# Altium PCB GMAX0505_MB.PcbDoc
Units mm, origin at the board's own origin, x right, y up, seen from the top; angles counter-clockwise.
Board outline 185 x 150 mm, 2 copper layers (Top Layer, Bottom Layer); 54 components, 80 nets, 242 pads, 0 vias.
Unrouted connection lines stored in the file: 141.
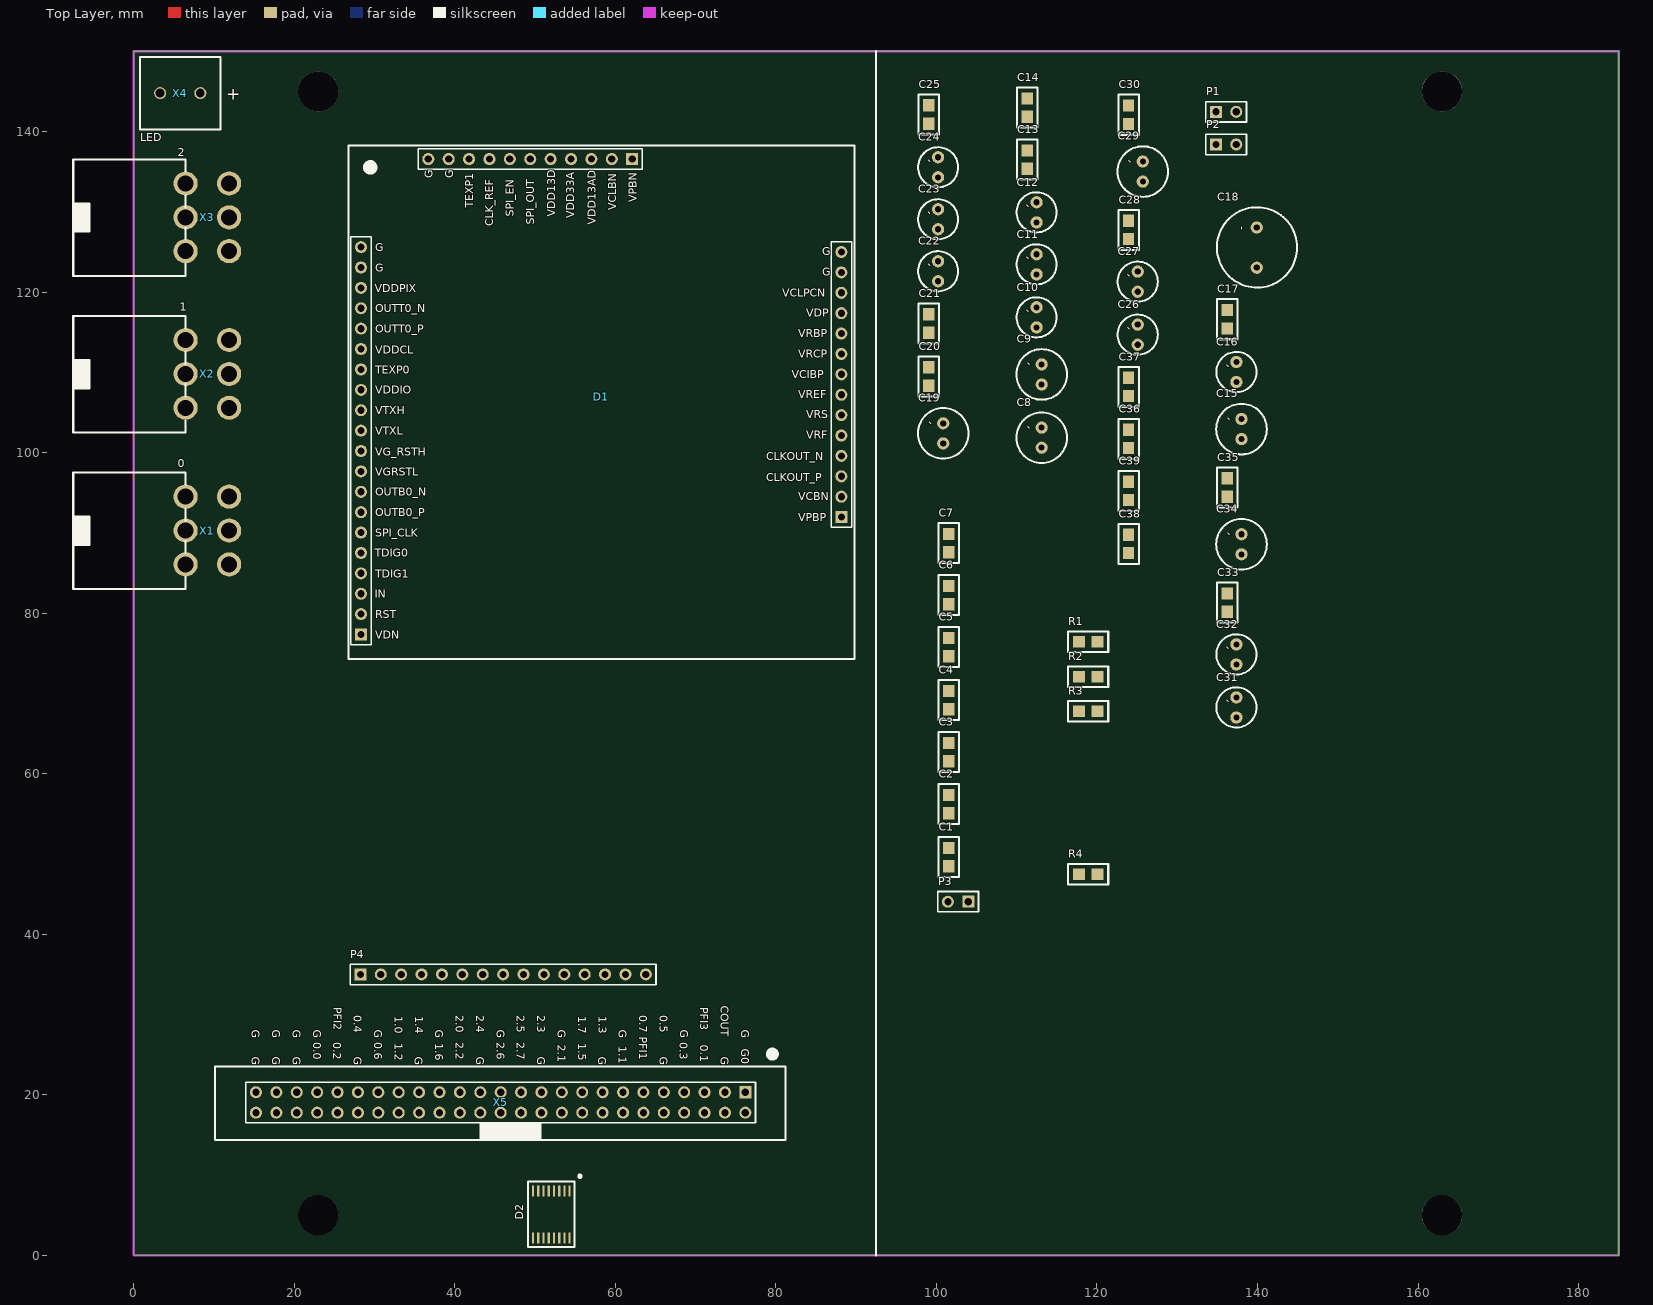
[diagram p0: Top Layer view]
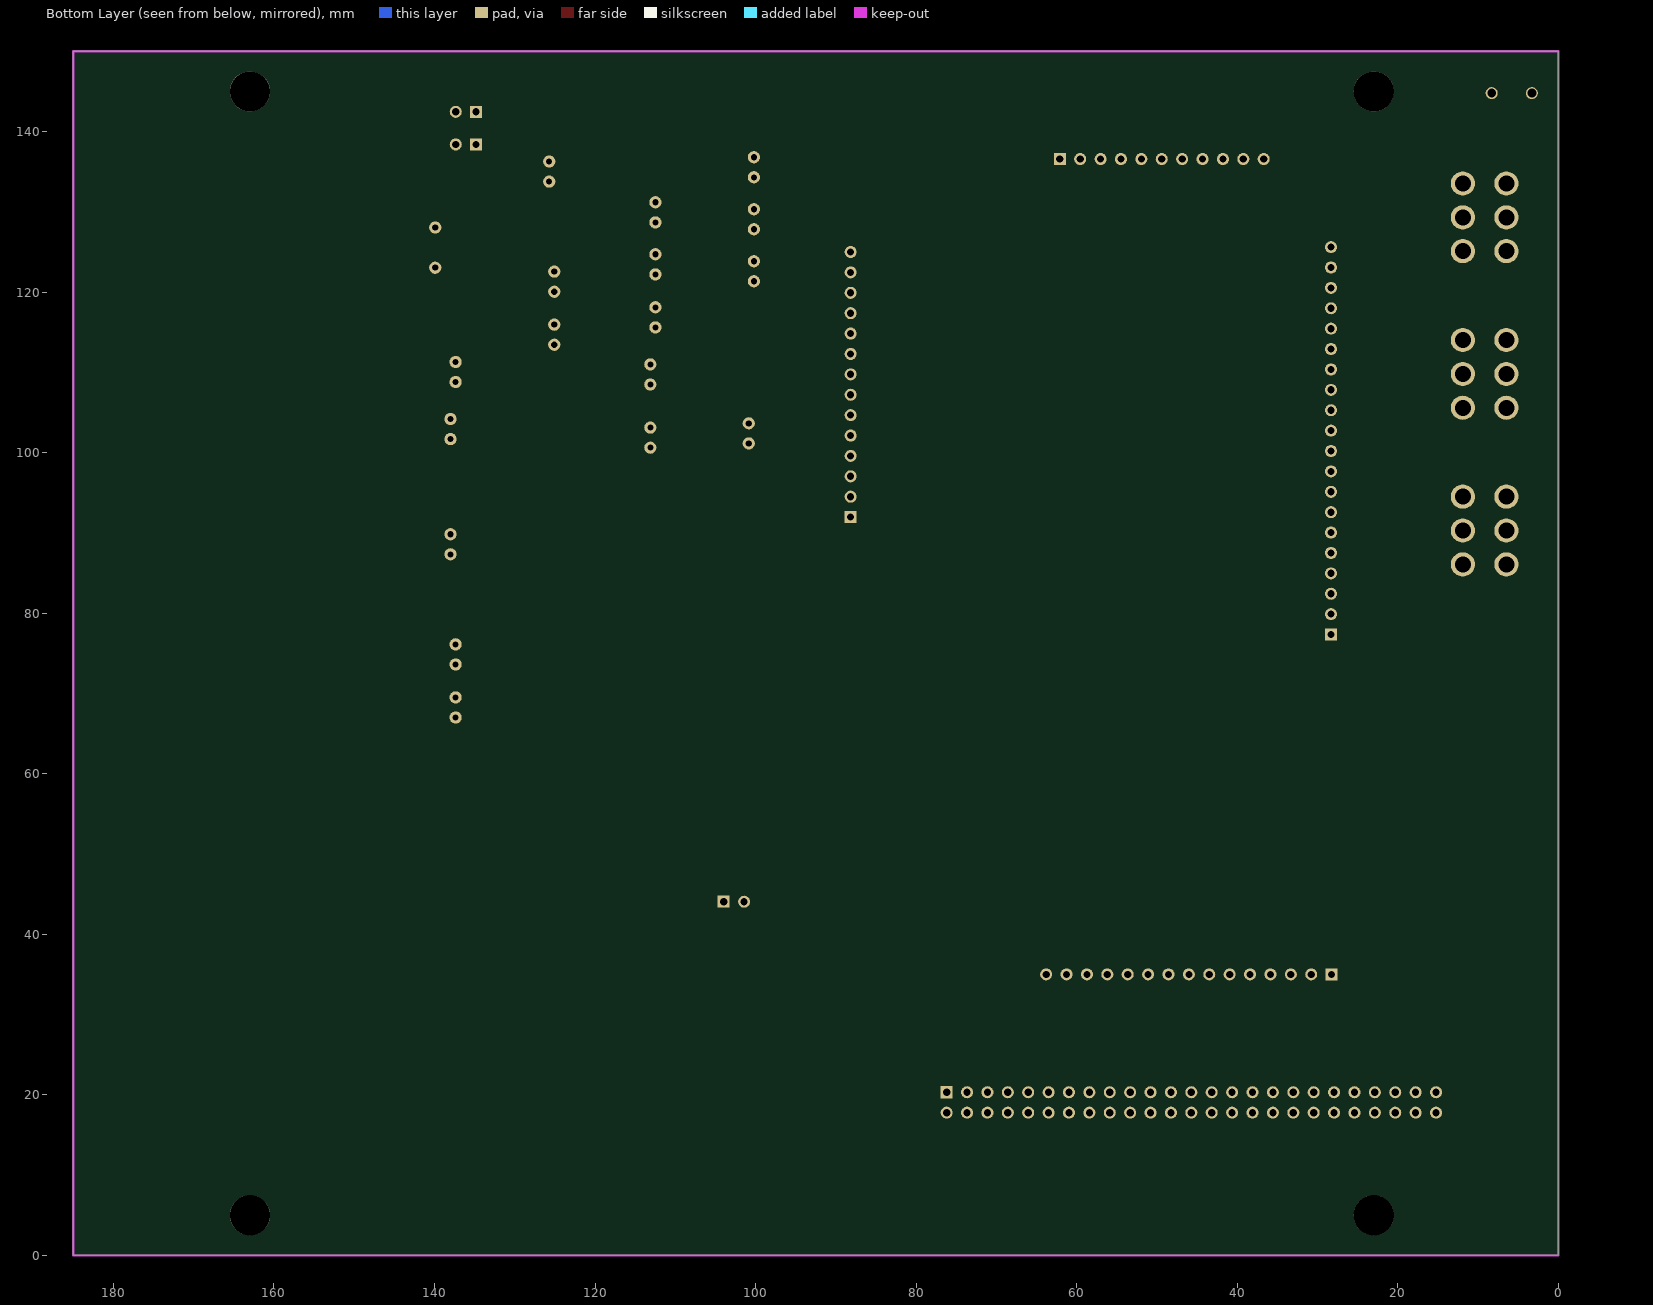
[diagram p1: Bottom Layer view, seen from below]

## Layer stack, top to bottom
Top Solder: solder mask 0.0102, Solder Resist, Dk 3.5
Top Layer: signal copper 0.0356
Dielectric 1: dielectric 0.32, FR-4, Dk 4.8
Bottom Layer: signal copper 0.0356
Bottom Solder: solder mask 0.0102, Solder Resist, Dk 3.5

## Board outline
0,0 0,150 185,150 185,0

## Design rules (kind name [scope] priority, off if disabled: settings)
BoardOutlineClearance [OnLayer('Multi-Layer')] p1: gap=0.254 ignorepadtopadclearanceinfootprint=FALSE except(0: Arc-SplitContinuation Track-SplitContinuation SMDPad-SplitContinuation THPad-SplitContinuation Via-SplitContinuation Fill-SplitContinuation Poly-SplitContinuation Region-SplitContinuation Text-SplitContinuation; 0.4: Arc-OutlineEdge Track-OutlineEdge SMDPad-OutlineEdge THPad-OutlineEdge Via-OutlineEdge Fill-OutlineEdge Poly-OutlineEdge Region-OutlineEdge Text-OutlineEdge)
Clearance [All] p1: gap=0.125 ignorepadtopadclearanceinfootprint=FALSE except(0.2: Arc-Fill Arc-Poly Track-Fill Track-Poly SMDPad-Fill SMDPad-Poly THPad-Fill THPad-Poly Via-Fill Via-Poly Fill-Fill Fill-Poly Poly-Poly Poly-Region Poly-Text; 0.25: Arc-Hole Track-Hole SMDPad-Hole THPad-Hole Via-Hole Fill-Hole Poly-Hole Region-Hole Text-Hole) // Standart
DiffPairsRouting [All] p1: maxlimit=0.254 minlimit=0.127 mostfreqgap=0.13 toplayer_minwidth=0.127 toplayer_maxwidth=0.381 toplayer_prefwidth=0.37 bottomlayer_minwidth=0.127 bottomlayer_maxwidth=0.381 bottomlayer_prefwidth=0.37 maxuncoupledlength=12.7
HoleSize [All] p1: absolutevalues=TRUE maxlimit=5 minlimit=0.3 maxpercent=80.000 minpercent=20.000
MinimumSolderMaskSliver [All] p1: minsoldermaskwidth=0.1
PlaneClearance "PlaneClearance-1 1/2 Oz" [All] p1: clearance=0.2 // Standart
PlaneConnect "TermalConnect-1 1/2 Oz" [All] p1: planeconnectstyle=Relief reliefexpansion=0.2 reliefentries=4 reliefconductorwidth=0.2 reliefairgap=0.2 // Standart
PolygonConnect "PolygonConnect-1 1/2 Oz" [All] p1: thpad.connectstyle=Relief thpad.reliefconductorwidth=0.15 thpad.reliefentries=4 thpad.polygonreliefangle="90 Angle" thpad.airgapwidth=0.2 smdpad.connectstyle=Relief smdpad.reliefconductorwidth=0.2 smdpad.reliefentries=4 smdpad.polygonreliefangle="90 Angle" smdpad.airgapwidth=0.2 via.connectstyle=Direct via.reliefconductorwidth=0.254 via.reliefentries=4 via.polygonreliefangle="90 Angle" via.airgapwidth=0.254 // Standart
RoutingVias [All] p1: holewidth=0.3 width=1.27 viastyle="Through Hole" minholewidth=0.3 minwidth=0.6 maxholewidth=0.711 maxwidth=1.27
SilkToSilkClearance [All] p1: silktosilkclearance=0
SilkToSolderMaskClearance [IsPad] p1: minsilkscreentomaskgap=0 clearancetoexposedcopper=TRUE
SolderMaskExpansion [All] p1: expansion=0.102 istentingtop=FALSE
UnRoutedNet [All] p1: checkbadconnections=TRUE
Width [All] p1: maxlimit=2.5 minlimit=0.125 preferedwidth=0.37
22 further rules are at their usual default settings.

## Classes and differential pairs
differential pair OUTT0: +OUTT0_P -OUTT0_N
differential pair OUTB0: +OUTB0_P -OUTB0_N
differential pair CLKOUT: +CLKOUT_P -CLKOUT_N
differential pair 4: +4_P -4_N
differential pair 3: +3_P -3_N
differential pair 2: +2_P -2_N
differential pair 1: +1_P -1_N

## Components (designator, comment, footprint, x,y, rotation, side; value= is the part's Value field where it differs from the comment)
C1 "0,1 мкФ" CAP_SMALL 102.828,47.105 r90 top
C2 "0,1 мкФ" CAP_SMALL 102.828,53.709 r90 top
C3 "0,1 мкФ" CAP_SMALL 102.828,60.186 r90 top
C4 "0,1 мкФ" CAP_SMALL 102.828,66.663 r90 top
C5 "0,1 мкФ" CAP_SMALL 102.828,73.267 r90 top
C6 "0,1 мкФ" CAP_SMALL 102.828,79.744 r90 top
C7 "0,1 мкФ" CAP_SMALL 102.828,86.221 r90 top
C8 "100 мкФ" Cap_0612_electrolitic 113.115,101.867 r90 top
C9 "100 мкФ" Cap_0612_electrolitic 113.115,109.741 r90 top
C10 "22 мкФ" Cap_0511_electrolitic 112.48,116.853 r90 top
C11 "22 мкФ" Cap_0511_electrolitic 112.48,123.457 r90 top
C12 "22 мкФ" Cap_0511_electrolitic 112.48,129.934 r90 top
C13 "0,1 мкФ" CAP_SMALL 112.607,133.998 r90 top
C14 "0,1 мкФ" CAP_SMALL 112.607,140.475 r90 top
C15 "100 мкФ" Cap_0612_electrolitic 138.007,102.934 r90 top
C16 "10 мкФ" Cap_0511_electrolitic 137.372,110.046 r90 top
C17 "0,1 мкФ" CAP_SMALL 137.499,114.11 r90 top
C18 "330 мкФ" Cap_1013_electrolitic 139.912,125.54 r90 top
C19 "100 мкФ" Cap_0612_electrolitic 100.847,102.4 r90 top
C20 "0,1 мкФ" CAP_SMALL 100.339,106.972 r90 top
C21 "0,1 мкФ" CAP_SMALL 100.339,113.576 r90 top
C22 "22 мкФ" Cap_0511_electrolitic 100.212,122.593 r90 top
C23 "22 мкФ" Cap_0511_electrolitic 100.212,129.07 r90 top
C24 "22 мкФ" Cap_0511_electrolitic 100.212,135.547 r90 top
C25 "0,1 мкФ" CAP_SMALL 100.339,139.611 r90 top
C26 "22 мкФ" Cap_0511_electrolitic 125.078,114.694 r90 top
C27 "22 мкФ" Cap_0511_electrolitic 125.078,121.298 r90 top
C28 "0,1 мкФ" CAP_SMALL 125.205,125.235 r90 top
C29 "100 мкФ" Cap_0612_electrolitic 125.713,135.014 r90 top
C30 "0,1 мкФ" CAP_SMALL 125.205,139.586 r90 top
C31 "22 мкФ" Cap_0511_electrolitic 137.372,68.263 r90 top
C32 "22 мкФ" Cap_0511_electrolitic 137.372,74.867 r90 top
C33 "0,1 мкФ" CAP_SMALL 137.499,78.804 r90 top
C34 "100 мкФ" Cap_0612_electrolitic 138.007,88.583 r90 top
C35 "0,1 мкФ" CAP_SMALL 137.499,93.155 r90 top
C36 "0,1 мкФ" CAP_SMALL 125.205,99.2 r90 top
C37 "0,1 мкФ" CAP_SMALL 125.205,105.677 r90 top
C38 "0,1 мкФ" CAP_SMALL 125.205,86.119 r90 top
C39 "0,1 мкФ" CAP_SMALL 125.205,92.723 r90 top
D1 "GMAX0505" GMAX0505_MEZ 28.321,77.343 r0 top
D2 "SN65LVDS048A" "SN65LVDS048A (4LVDS)" 54.31,8.034 r180 top
P1 "GND" HDR1X2 134.815,142.456 r0 top
P2 "GND" HDR1X2 134.815,138.392 r0 top
P3 "GND" HDR1X2 103.971,44.057 r180 top
P4 "Header 15" HDR1X15 28.245,35.001 r0 top
R1 "100" RES 121.395,75.172 r90 top
R2 "100" RES 121.395,70.854 r90 top
R3 "100" RES 121.395,66.536 r90 top
R4 "100" RES 121.395,46.216 r90 top
X1 "0" POWER 6.477,94.514 r90 top
X2 "1" POWER 6.477,114.022 r90 top
X3 "2" POWER 6.477,133.53 r90 top
X4 "LED" KLEMMNIK_2 3.302,144.78 r0 top
X5 "IDC_7953" IDC_7953 76.2,20.32 r180 top

## Footprints (in the part's own frame and the unit in brackets; to place one, negate y for a bottom-side part, rotate by r counter-clockwise, add the part's x,y. Pads: shape width x height; smd on the part's side, far side on the other; paste and mask are expansions set on the pad)
Cap_0511_electrolitic [mil]
  round 60 hole 30: 1(-49.21,0) 2(49.21,0)
  silkscreen extent -98,-98 98,98
Cap_0612_electrolitic [mil]
  round 60 hole 30: 1(-49.21,0) 2(49.21,0)
  silkscreen extent -124,-124 124,124
Cap_1013_electrolitic [mil]
  round 60 hole 30: 1(-98.43,0) 2(98.43,0)
  silkscreen extent -196,-198 198,196
CAP_SMALL [mil] "FROM_MAX"
  rect 60x55.98 smd: 1(53.71,50) 2(143.71,50)
  silkscreen extent 1,0 197,100, body extent 20,18 178,82, height 100
GMAX0505_MEZ [mm] "GMAX0505_MEZ"
  rect 1.5x1.5 hole 0.9: 1(0,0) 31(33.782,59.233) 45(59.842,14.63)
  round 1.5 hole 0.9: 2(0,2.54) 3(0,5.08) 4(0,7.62) 5(0,10.16) 6(0,12.7) 7(0,15.24) 8(0,17.78) 9(0,20.32) 10(0,22.86) 11(0,25.4) 12(0,27.94) 13(0,30.48) 14(0,33.02) 15(0,35.56) 16(0,38.1) 17(0,40.64) 18(0,43.18) 19(0,45.72) 20(0,48.26) 21(8.382,59.233) 22(10.922,59.233) 23(13.462,59.233) 24(16.002,59.233) 25(18.542,59.233) 26(21.082,59.233) 27(23.622,59.233) 28(26.162,59.233) 29(28.702,59.233) 30(31.242,59.233) 32(59.842,47.65) 33(59.842,45.11) 34(59.842,42.57) 35(59.842,40.03) 36(59.842,37.49) 37(59.842,34.95) 38(59.842,32.41) 39(59.842,29.87) 40(59.842,27.33) 41(59.842,24.79) 42(59.842,22.25) 43(59.842,19.71) 44(59.842,17.17)
  silkscreen extent -1.55,-3.06 61.45,60.94
HDR1X2 [mm] "Connector; Header; 2 Position"
  rect 1.5x1.5 hole 0.9: 1(0,0)
  round 1.5 hole 0.9: 2(2.54,0)
  silkscreen extent -1.27,-1.27 3.81,1.27
HDR1X15 [mm] "Connector; Header; 15 Position"
  rect 1.5x1.5 hole 0.9: 1(0,0)
  round 1.5 hole 0.9: 2(2.54,0) 3(5.08,0) 4(7.62,0) 5(10.16,0) 6(12.7,0) 7(15.24,0) 8(17.78,0) 9(20.32,0) 10(22.86,0) 11(25.4,0) 12(27.94,0) 13(30.48,0) 14(33.02,0) 15(35.56,0)
  silkscreen extent -1.27,-1.27 36.83,1.27
IDC_7953 [mm]
  rect 1.5x1.5 hole 0.9: 1(0,0)
  round 1.5 hole 0.9: 2(0,2.54) 3(2.54,0) 4(2.54,2.54) 5(5.08,0) 6(5.08,2.54) 7(7.62,0) 8(7.62,2.54) 9(10.16,0) 10(10.16,2.54) 11(12.7,0) 12(12.7,2.54) 13(15.24,0) 14(15.24,2.54) 15(17.78,0) 16(17.78,2.54) 17(20.32,0) 18(20.32,2.54) 19(22.86,0) 20(22.86,2.54) 21(25.4,0) 22(25.4,2.54) 23(27.94,0) 24(27.94,2.54) 25(30.48,0) 26(30.48,2.54) 27(33.02,0) 28(33.02,2.54) 29(35.56,0) 30(35.56,2.54) 31(38.1,0) 32(38.1,2.54) 33(40.64,0) 34(40.64,2.54) 35(43.18,0) 36(43.18,2.54) 37(45.72,0) 38(45.72,2.54) 39(48.26,0) 40(48.26,2.54) 41(50.8,0) 42(50.8,2.54) 43(53.34,0) 44(53.34,2.54) 45(55.88,0) 46(55.88,2.54) 47(58.42,0) 48(58.42,2.54) 49(60.96,0) 50(60.96,2.54)
  silkscreen extent -5.03,-5.14 66.07,5.92
KLEMMNIK_2 [mm]
  round 1.5 hole 1.1: 1(0,0) 2(5,0)
  silkscreen extent -2.5,-4.5 7.5,4.5
POWER [mm] "POWER"
  round 3 hole 2: 1(0,0) 2(-4.217,0) 3(-8.435,0) 4(-8.435,-5.422) 5(-4.217,-5.422) 6(0,-5.422)
  silkscreen extent -11.5,0 3,14
RES [mil] "FROM_MAX"
  rect 55.98x60 smd: 1(49,52.71) 2(49,142.71)
  silkscreen extent -1,0 99,196, body extent 17,19 81,177, height 100
"SN65LVDS048A (4LVDS)" [mm]
  rect 0.28x1.35 smd: 1(0,0) 2(0.65,0) 3(1.3,0) 4(1.95,0) 5(2.6,0) 6(3.25,0) 7(3.9,0) 8(4.55,0) 9(4.55,5.85) 10(3.9,5.85) 11(3.25,5.85) 12(2.6,5.85) 13(1.95,5.85) 14(1.3,5.85) 15(0.65,5.85) 16(0,5.85)
  silkscreen extent -1.49,-2.03 5.18,7

## Part data
C1 C2 C3 C4 C5 C6 C7 C13 C14 C17 C20 C21 C25 C28 C30 C33 C35 C36 C37 C38 C39: library part CAP_SMALL
C8 C9 C15 C19 C29 C34: library part Cap_electrolotoc_0612
C10 C11 C12 C16 C22 C23 C24 C26 C27 C31 C32: library part Cap_electrolotoc_0511
C18: library part Cap_electrolotoc_1013
D1: library part GMAX0505_MEZ
D2: library part "SN65LVDS048A (4LVDS)"
P1 P2 P3: library part "Header 2", "Header, 2-Pin", LatestRevisionDate=17-Jul-2002, LatestRevisionNote="Re-released for DXP Platform.", Publisher="Altium Limited"
P4: "Header, 15-Pin", LatestRevisionDate=17-Jul-2002, LatestRevisionNote="Re-released for DXP Platform.", Publisher="Altium Limited"
R1 R2 R3 R4: library part RES
X1 X2 X3: library part POWER
X4: library part KLEMMNIK_2

## Free pads (board coordinates)
  round 5 hole 5 unplated: H(23,5) H(23,145) H(163,5) H(163,145)

## Nets (pads, with @x,y where several pads share a name; then routed paths per layer and width w, separated by ;. In a path a pad name is that pad's centre, name@x,y a point inside that pad or via, vN(x,y) a via of type N, cw(c..) or ccw(c..) an arc to the next point about the centre after c; other vN are vias at no path point)
1: D2.15
1_N: D2.1 R1.1
1_P: D2.2 R1.2
2: D2.14
2_N: D2.4 R2.2
2_P: D2.3 R2.1
3: D2.11
3,3V_LVDS: D2.13 D2.16
3_N: D2.5 R3.1
3_P: D2.6 R3.2
4: D2.10
4_N: D2.8 R4.2
4_P: D2.7 R4.1
CLK_REF: D1.24
CLKOUT_N: D1.42
CLKOUT_P: D1.43
GND: C1.2 C2.2 C3.2 C4.2 C5.2 C6.2 C7.2 C8.2 C9.2 C10.2 C11.2 C12.2 C13.2 C14.2 C15.2 C16.2 C17.2 C18.2 C19.2 C20.2 C21.2 C22.2 C23.2 C24.2 C25.2 C26.2 C27.2 C28.1 C29.2 C30.2 C31.1 C32.1 C33.1 C34.1 C35.2 D1.19 D1.20 D1.21 D1.22 D1.32 D1.33 D2.9 D2.12 P2.2 P3.1 P3.2 X1.4 X1.5 X1.6 X2.4 X2.5 X2.6 X3.4 X3.5 X3.6 X4.2 X5.1 X5.4 X5.7 X5.10 X5.13 X5.16 X5.19 X5.22 X5.25 X5.28 X5.31 X5.34 X5.37 X5.40 X5.43 X5.45 X5.46 X5.47 X5.48 X5.49 X5.50
NetP1_1: P1.1 P1.2 P2.1
NetX3_3: X3.3 X4.1
OUTB0_N: D1.8
OUTB0_P: D1.7
OUTT0_N: D1.17
OUTT0_P: D1.16
P0.0: X5.44
P0.1: X5.6
P0.2: X5.42
P0.3: X5.8
P0.4: X5.39
P0.5: X5.9
P0.6: X5.38
P0.7: X5.11
P1.0: X5.35
P1.1: X5.14
P1.2: X5.36
P1.3: X5.15
P1.4: X5.33
P1.5: X5.18
P1.6: X5.32
P1.7: X5.17
P2.0: X5.29
P2.1: X5.20
P2.2: X5.30
P2.3: X5.21
P2.4: X5.27
P2.5: X5.23
P2.6: X5.26
P2.7: X5.24
PFI1: X5.12
PFI2: X5.41
PFI3: X5.5
SPI_CLK: D1.6
SPI_EN: D1.25
SPI_IN: D1.3
SPI_OUT: D1.26
SYS_RST_N: D1.2
TDIG0: D1.5
TDIG1: D1.4
TEXP0: D1.14
TEXP1: D1.23
VCBN: C1.1 D1.44
VCIBP: C37.1 D1.38
VCLBN: C7.1 D1.30
VCLPCN: C5.1 D1.34
VDD13: C8.1 C9.1 C10.1 C11.1 C12.1 C13.1 C14.1 D1.27 D1.29 X3.1
VDD33A: C15.1 C16.1 C17.1 C36.2 C37.2 C38.2 C39.2 D1.28 X3.2
VDDCL: C26.1 C27.1 C28.2 D1.15 X2.2
VDDIO: C22.1 C23.1 C24.1 C25.1 D1.13 X2.1
VDN: D1.1
VDP: D1.35
VG_RSTH: C29.1 C30.1 D1.10 X1.1
VGRSTL: C31.2 C32.2 C33.2 D1.9 X1.3
VPBN: C6.1 D1.31
VPBP: C39.1 D1.45
VRBP: C36.1 D1.36
VRCP: C38.1 D1.37
VREF: C4.1 D1.39
VRF: C2.1 D1.41
VRS: C3.1 D1.40
VTXH_PIX: C18.1 C19.1 C20.1 C21.1 D1.12 D1.18 X1.2
VTXL: C34.2 C35.1 D1.11 X2.3
pads on no net: P4.1 P4.2 P4.3 P4.4 P4.5 P4.6 P4.7 P4.8 P4.9 P4.10 P4.11 P4.12 P4.13 P4.14 P4.15 X5.2 X5.3

## Keep-outs
Keep-Out Layer:
  the board outline again, w0.254

## Other copper
Multi-Layer:
  pour cut-out: 28,150 28,140 18,140 18,150
  pour cut-out: 168,150 168,140 158,140 158,150
  pour cut-out: 168,10 168,0 158,0 158,10
  pour cut-out: 28,10 28,0 18,0 18,10

## Silkscreen, mask and mechanical layers (free items; w line width, h text height)
Top Overlay:
  lines w0.254: 92.5,0 92.5,144 92.5,150
  text "+" at 11.557,143.942 h1.52

## Text inside footprints (layer, text, board x,y; h text height)
C8: Top Overlay "-" at 111.954,103.235 h1 r135
C9: Top Overlay "-" at 111.954,111.109 h1 r135
C10: Top Overlay "-" at 111.819,117.721 h1 r135
C11: Top Overlay "-" at 111.819,124.325 h1 r135
C12: Top Overlay "-" at 111.819,130.802 h1 r135
C15: Top Overlay "-" at 136.846,104.302 h1 r135
C16: Top Overlay "-" at 136.711,110.914 h1 r135
C18: Top Overlay "-" at 138.412,127.707 h1 r90
C19: Top Overlay "-" at 99.686,103.768 h1 r135
C22: Top Overlay "-" at 99.551,123.461 h1 r135
C23: Top Overlay "-" at 99.551,129.938 h1 r135
C24: Top Overlay "-" at 99.551,136.415 h1 r135
C26: Top Overlay "-" at 124.417,115.562 h1 r135
C27: Top Overlay "-" at 124.417,122.166 h1 r135
C29: Top Overlay "-" at 124.552,136.382 h1 r135
C31: Top Overlay "-" at 136.711,69.131 h1 r135
C32: Top Overlay "-" at 136.711,75.735 h1 r135
C34: Top Overlay "-" at 136.846,89.951 h1 r135
D1: Top Overlay "VDDPIX" at 30.042,119.998 h1; Top Overlay "G" at 85.809,124.57 h1; Top Overlay "G" at 85.809,122.042 h1; Top Overlay "VCLPCN" at 80.811,119.414 h1; Top Overlay "VDP" at 83.81,116.899 h1; Top Overlay "VRBP" at 82.81,114.359 h1; Top Overlay "VRCP" at 82.81,111.844 h1; Top Overlay "VCIBP" at 81.977,109.254 h1; Top Overlay "VREF" at 82.81,106.764 h1; Top Overlay "VRS" at 83.81,104.275 h1; Top Overlay "VRF" at 83.81,101.735 h1; Top Overlay "CLKOUT_N" at 78.811,99.024 h1; Top Overlay "CLKOUT_P" at 78.811,96.459 h1; Top Overlay "VCBN" at 82.81,94.039 h1; Top Overlay "VPBP" at 82.81,91.423 h1; Top Overlay "VDN" at 30.069,76.792 h1; Top Overlay "RST" at 30.069,79.383 h1; Top Overlay "IN" at 30.06,81.949 h1; Top Overlay "TDIG1" at 30.074,84.438 h1; Top Overlay "TDIG0" at 30.06,87.003 h1; Top Overlay "SPI_CLK" at 30.076,89.55 h1; Top Overlay "OUTB0_P" at 30.069,92.065 h1; Top Overlay "OUTB0_N" at 30.069,94.63 h1; Top Overlay "VGRSTL" at 30.069,97.138 h1; Top Overlay "VG_RSTH" at 30.069,99.634 h1; Top Overlay "VTXL" at 30.069,102.243 h1; Top Overlay "VTXH" at 30.069,104.758 h1; Top Overlay "VDDIO" at 30.069,107.323 h1; Top Overlay "TEXP0" at 30.069,109.838 h1; Top Overlay "VDDCL" at 30.069,112.327 h1; Top Overlay "OUTT0_P" at 30.069,114.95 h1; Top Overlay "OUTT0_N" at 30.069,117.49 h1; Top Overlay "G" at 30.069,122.538 h1; Top Overlay "G" at 30.069,125.103 h1; Top Overlay "VCLBN" at 60.088,130.19 h1 r90; Top Overlay "VDD13AD" at 57.574,128.358 h1 r90; Top Overlay "VDD33A" at 54.881,129.191 h1 r90; Top Overlay "VDD13D" at 52.494,129.357 h1 r90; Top Overlay "SPI_OUT" at 49.896,128.358 h1 r90; Top Overlay "SPI_EN" at 47.33,129.357 h1 r90; Top Overlay "CLK_REF" at 44.765,128.191 h1 r90; Top Overlay "TEXP1" at 42.308,130.524 h1 r90; Top Overlay "G" at 39.794,134.185 h1 r90; Top Overlay "G" at 37.228,134.185 h1 r90; Top Overlay "VPBN" at 62.679,131.19 h1 r90
X5: Top Overlay "G" at 75.684,28.101 h1 r270; Top Overlay "G0" at 75.674,25.742 h1 r270; Top Overlay "G" at 73.135,24.743 h1 r270; Top Overlay "COUT" at 73.144,31.1 h1 r270; Top Overlay "0.1" at 70.595,26.242 h1 r270; Top Overlay "PFI3" at 70.605,30.933 h1 r270; Top Overlay "0.3" at 68.056,26.575 h1 r270; Top Overlay "G" at 68.066,28.101 h1 r270; Top Overlay "G" at 65.517,24.743 h1 r270; Top Overlay "0.5" at 65.526,29.933 h1 r270; Top Overlay "PFI1" at 62.977,27.242 h1 r270; Top Overlay "0.7" at 62.987,29.933 h1 r270; Top Overlay "1.1" at 60.438,26.076 h1 r270; Top Overlay "G" at 60.448,28.101 h1 r270; Top Overlay "G" at 57.899,24.743 h1 r270; Top Overlay "1.3" at 57.909,29.767 h1 r270; Top Overlay "1.5" at 55.36,26.409 h1 r270; Top Overlay "1.7" at 55.369,29.767 h1 r270; Top Overlay "2.1" at 52.82,26.242 h1 r270; Top Overlay "G" at 52.83,28.101 h1 r270; Top Overlay "G" at 50.281,24.743 h1 r270; Top Overlay "2.3" at 50.291,29.933 h1 r270; Top Overlay "2.7" at 47.742,26.575 h1 r270; Top Overlay "2.5" at 47.751,29.933 h1 r270; Top Overlay "2.6" at 45.202,26.575 h1 r270; Top Overlay "G" at 45.212,28.101 h1 r270; Top Overlay "G" at 42.663,24.743 h1 r270; Top Overlay "2.4" at 42.673,29.933 h1 r270; Top Overlay "2.2" at 40.124,26.575 h1 r270; Top Overlay "2.0" at 40.133,29.933 h1 r270; Top Overlay "1.6" at 37.584,26.409 h1 r270; Top Overlay "G" at 37.594,28.101 h1 r270; Top Overlay "G" at 35.045,24.743 h1 r270; Top Overlay "1.4" at 35.055,29.767 h1 r270; Top Overlay "1.2" at 32.506,26.409 h1 r270; Top Overlay "1.0" at 32.515,29.767 h1 r270; Top Overlay "0.6" at 29.966,26.575 h1 r270; Top Overlay "G" at 29.976,28.101 h1 r270; Top Overlay "G" at 27.427,24.743 h1 r270; Top Overlay "0.4" at 27.437,29.933 h1 r270; Top Overlay "0.2" at 24.888,26.575 h1 r270; Top Overlay "PFI2" at 24.897,30.933 h1 r270; Top Overlay "0.0" at 22.348,26.575 h1 r270; Top Overlay "G" at 22.358,28.101 h1 r270; Top Overlay "G" at 19.809,24.743 h1 r270; Top Overlay "G" at 19.819,28.101 h1 r270; Top Overlay "G" at 17.27,24.743 h1 r270; Top Overlay "G" at 17.28,28.101 h1 r270; Top Overlay "G" at 14.731,24.743 h1 r270; Top Overlay "G" at 14.74,28.101 h1 r270